# Altium PCB Lampda_PCB_V1_1.pcbdoc (part 1 of 2)
Units mm, origin at the board's own origin, x right, y up, seen from the top; angles counter-clockwise.
Board outline 71.29 x 71.78 mm, 2 copper layers (Top Layer, Bottom Layer); 128 components, 139 nets, 552 pads, 271 vias.
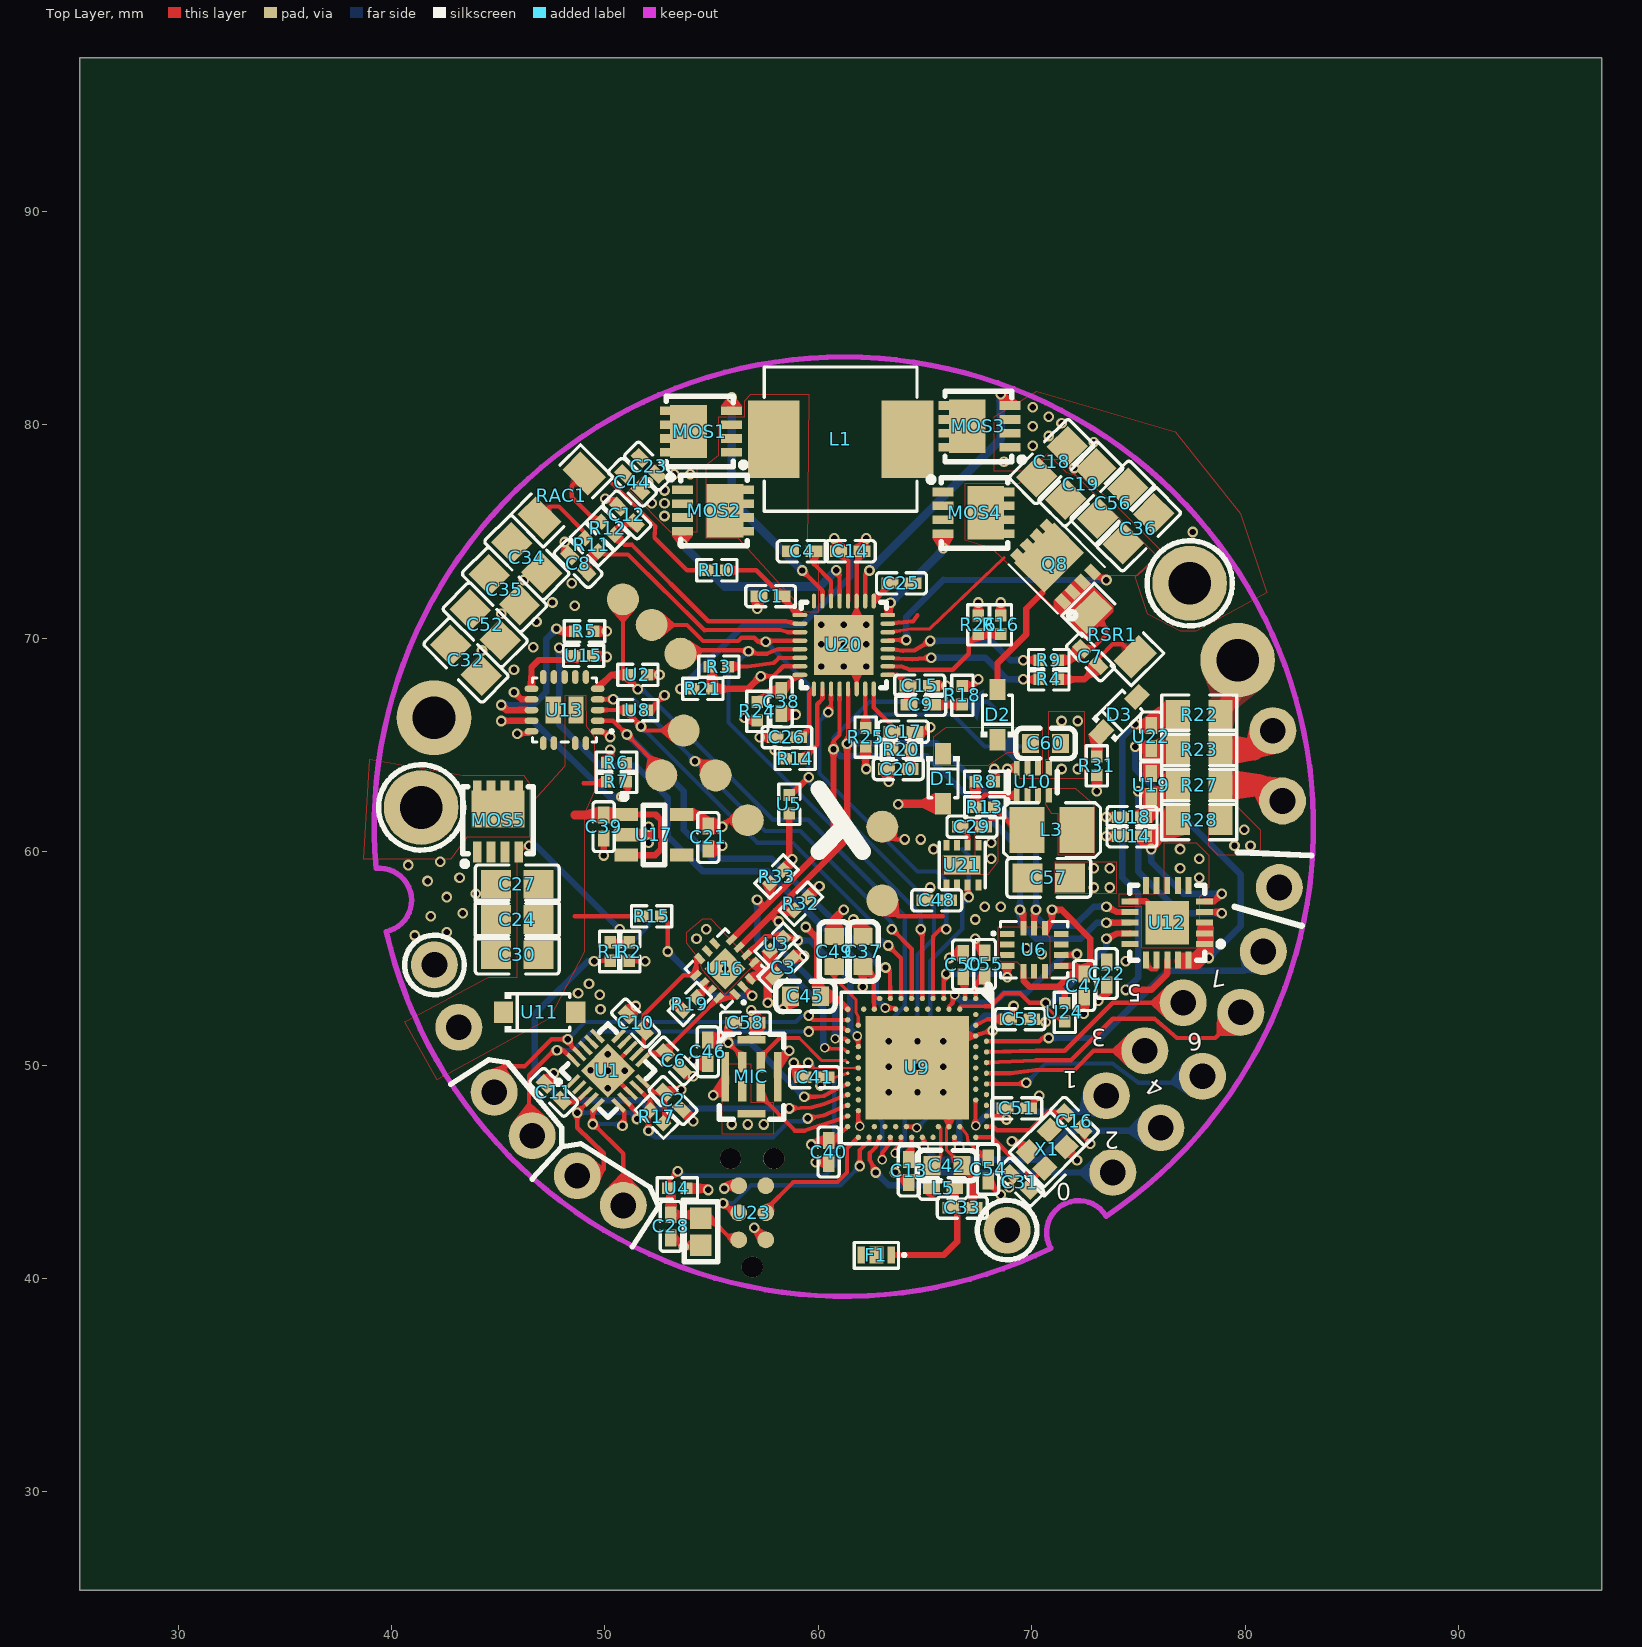
[diagram p0: Top Layer view]
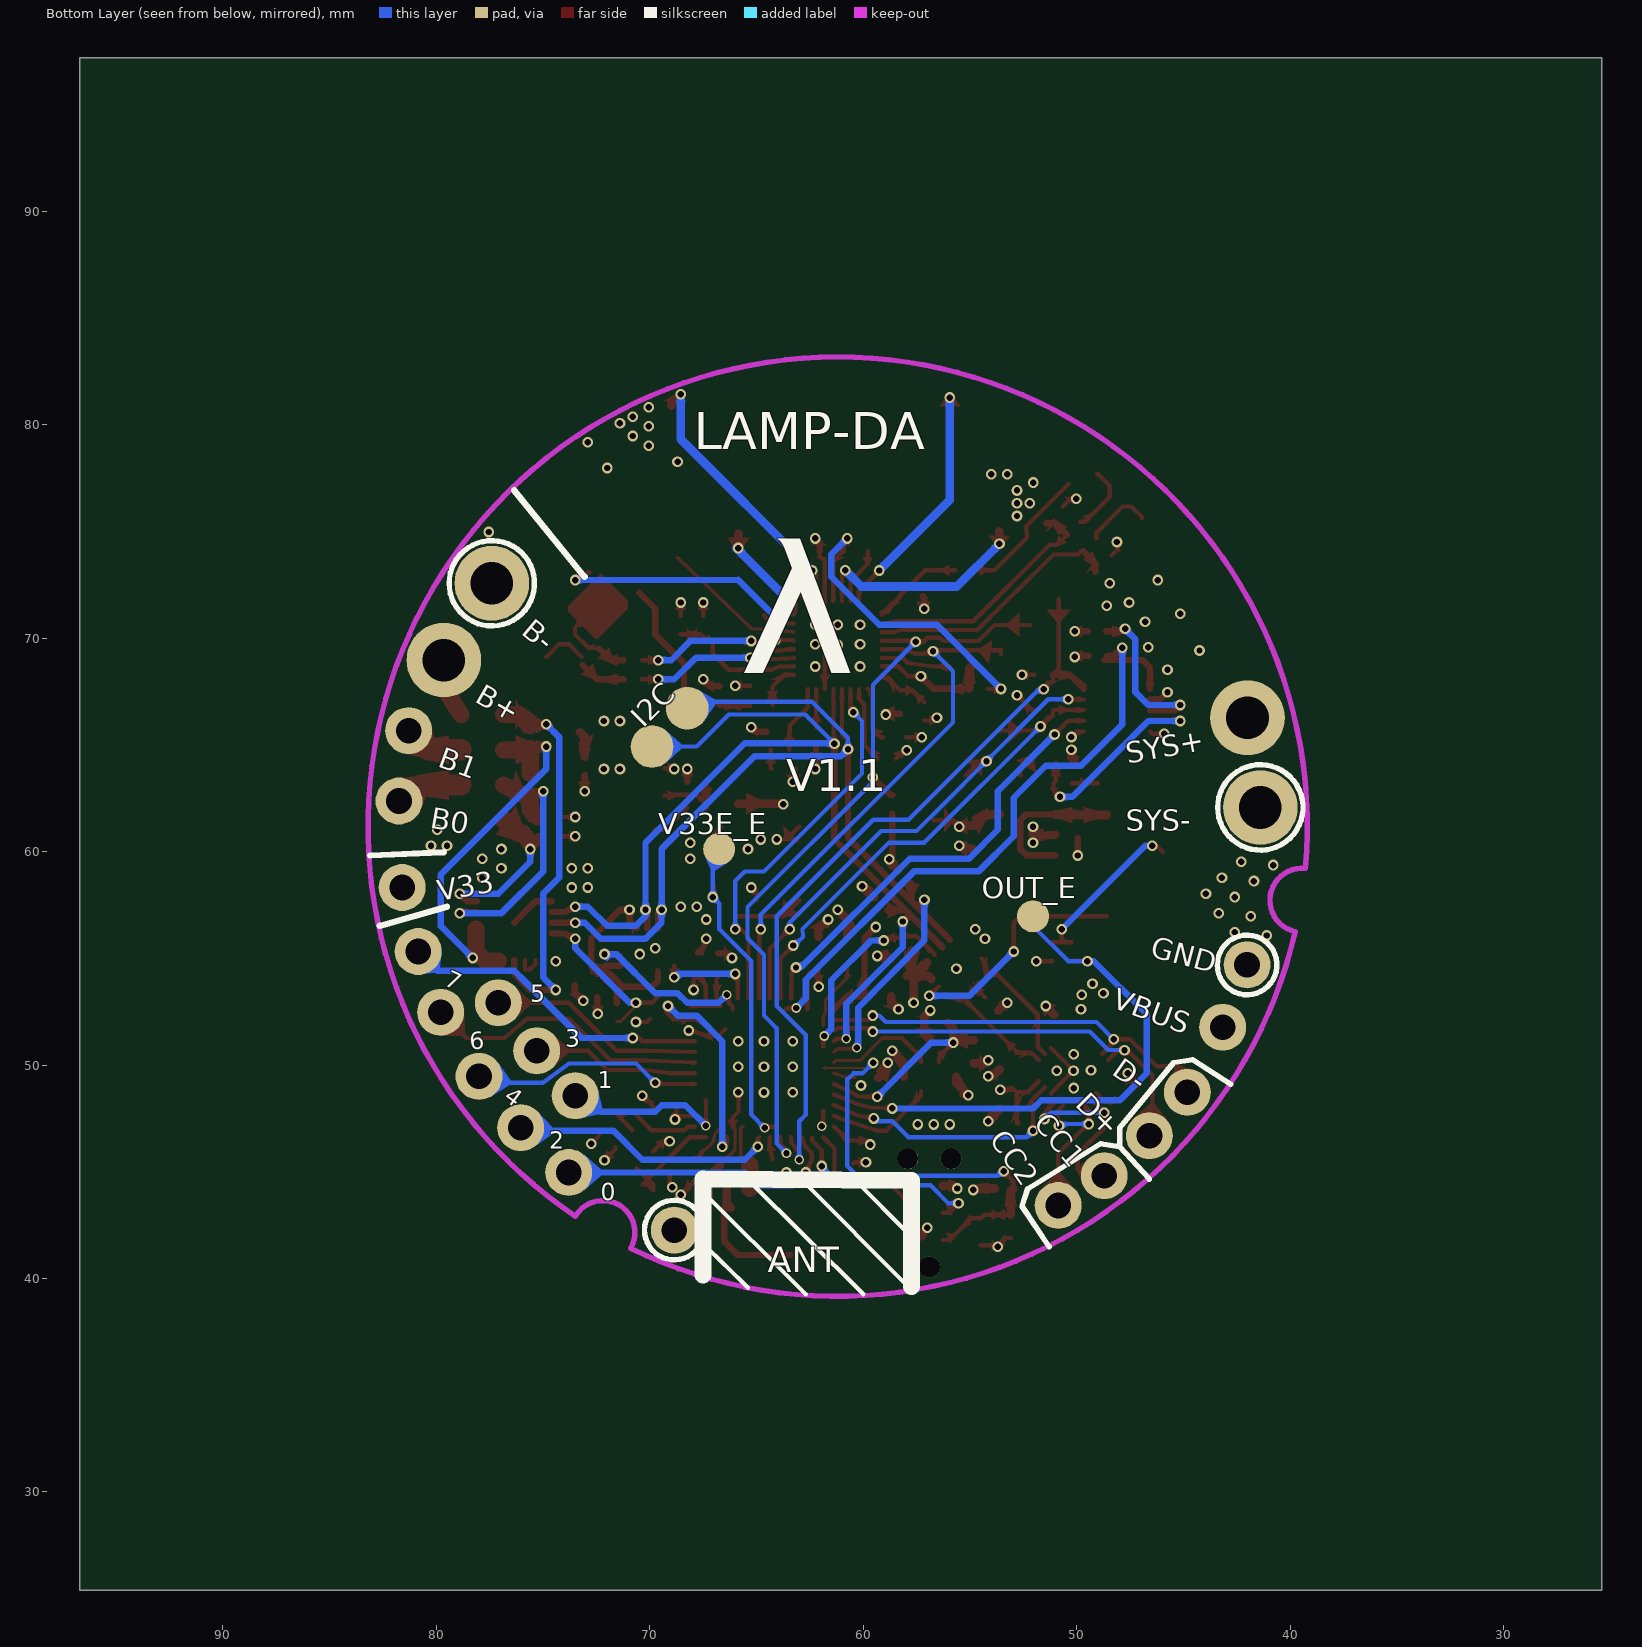
[diagram p1: Bottom Layer view, seen from below]

## Layer stack, top to bottom
Top Layer: signal copper (thickness not stored)
Dielectric: dielectric 0.32, FR-4, Dk 4.8
Bottom Layer: signal copper (thickness not stored)

## Board outline
96.689,25.4 25.4,25.4 25.4,97.18 96.689,97.18

## Components (designator, comment, footprint, x,y, rotation, side; value= is the part's Value field where it differs from the comment)
C1 "470nF" C0402 57.76,71.962 r180 top
C2 "1uF" C0402 53.188,48.34 r135 top
C3 "100nF" C0402 58.339,54.567 r225 top
C4 "47nF" C0402 59.239,74.066 r0 top
C6 "220pF" C0402 53.213,50.19 r315 top
C7 "100nF" C0402 72.739,69.116 r135 top
C8 "33nF" C0402 48.743,73.486 r315 top
C9 "680pF" C0402 64.789,66.866 r0 top
C10 "220pF" C0402 51.435,51.968 r315 top
C11 "100nF" C0402 47.6,48.721 r135 top
C12 "33nF" C0402 51.029,75.772 r135 top
C13 "820pF" C0402 64.237,45.038 r90 top
C14 "2.2uF" C0402 61.489,74.066 r180 top
C15 "15pF" C0402 64.745,67.771 r0 top
C16 "10pF" C0402 71.989,47.367 r135 top
C17 "33pF" C0402 63.983,65.612 r0 top
C18 "22uF" C0805 70.939,78.266 r225 top
C19 "22uF" C0805 72.289,77.216 r225 top
C20 "1.8nF" C0402 63.739,63.866 r180 top
C21 "2.2uF" C0402 54.839,60.659 r90 top
C22 "1uF" C0402 73.501,54.285 r90 top
C23 "10nF" C0402 52.045,78.058 r315 top
C24 "22uF" C0805 45.889,56.816 r0 top
C25 "47nF" C0402 63.889,72.566 r180 top
C26 "100pF" C0402 58.522,65.358 r180 top
C27 "22uF" C0805 45.889,58.467 r0 top
C28 "100nF" C0402 53.086,42.443 r90 top
C29 "680pF" C0402 67.189,61.167 r0 top
C30 "22uF" C0805 45.889,55.167 r0 top
C31 "10pF" C0402 69.439,44.517 r315 top
C32 "22uF" C0805 43.489,68.966 r315 top
C33 "0.5pF" C0402 66.739,43.317 r0 top
C34 "22uF" C0805 46.339,73.766 r315 top
C35 "22uF" C0805 45.289,72.266 r315 top
C36 "22uF" C0805 74.989,75.116 r225 top
C37 "4.7uF" C0603 62.089,55.317 r90 top
C38 "100pF" C0402 58.268,67.009 r270 top
C39 "1uF" C0402 49.939,61.167 r90 top
C40 "100nF" C0402 60.476,45.924 r270 top
C41 "100nF" C0402 59.817,49.428 r180 top
C42 "0.8pF" C0603 66.015,45.292 r180 top
C44 "1nF" C0402 51.283,77.296 r315 top
C45 "4.7uF" C0603 59.389,53.217 r180 top
C46 "100nF" C0402 54.819,50.622 r270 top
C47 "100nF" C0402 72.441,53.723 r90 top
C48 "1uF" C0402 65.539,57.717 r0 top
C49 "4.7uF" C0603 60.739,55.317 r90 top
C50 "100nF" C0402 66.777,54.69 r90 top
C51 "100nF" C0402 69.289,47.967 r0 top
C52 "22uF" C0805 44.389,70.616 r315 top
C53 "1uF" C0402 69.444,52.15 r180 top
C54 "100pF" C0402 67.945,45.11 r90 top
C55 "1uF" C0402 67.789,54.717 r90 top
C56 "22uF" C0805 73.789,76.316 r225 top
C57 "22uF" C0805 70.789,58.767 r180 top
C58 "1uF" C0402 56.578,51.985 r180 top
C60 "4.7uF" C0603 70.639,65.066 r180 top
D1 "BZT52C33S_C22375292" SOD-323_L1.9-W1.3-LS2.5-RD-1 65.839,63.417 r270 top
D2 "BZT52C33S_C22375292" SOD-323_L1.9-W1.3-LS2.5-RD-1 68.389,66.416 r90 top
D3 "BZT52C33S" SOD-323_L1.9-W1.3-LS2.5-RD-1 74.09,66.417 r45 top
F1 "ANT1608LL14R2400A" ANT-SMD_3P-L1.6-W0.8_ANT1608LL14R2400A 62.713,41.101 r180 top
L1 "2.2uH" IND-SMD_L7.0-W6.6_FXL0630 61.039,79.316 r180 top
L3 "DFE252012PD 2.2uH" L1008 70.939,61.017 r180 top
L5 "4.7nH" L0402 65.839,44.217 r0 top
MIC "MP34DT05TR-A" MIC-SMD_5P-L3.0-W4.0-P0.85-BL 56.863,49.45 r270 top
MOS1 "SIS412DN-T1-GE3" POWERPAK-1212-8_L3.0-W3.0-P0.65-LS3.3-BL 54.437,79.675 r90 top
MOS2 "SIS412DN-T1-GE3" POWERPAK-1212-8_L3.0-W3.0-P0.65-LS3.3-BL 55.109,75.971 r270 top
MOS3 "SIS412DN-T1-GE3" POWERPAK-1212-8_L3.0-W3.0-P0.65-LS3.3-BL 67.489,79.916 r90 top
MOS4 "SIS412DN-T1-GE3" POWERPAK-1212-8_L3.0-W3.0-P0.65-LS3.3-BL 67.316,75.866 r270 top
MOS5 "SIS412DN-T1-GE3" POWERPAK-1212-8_L3.0-W3.0-P0.65-LS3.3-BL 44.989,61.467 r0 top
Q8 "CSD25402Q3A" VSONP-8_L3.1-W3.1-P0.65-LS3.5-BL 71.089,73.466 r45 top
R1 "10Ω" R0402 50.239,55.317 r90 top
R2 "100kΩ" R0402 51.139,55.317 r270 top
R3 "10kΩ" R0402 55.339,68.666 r180 top
R4 "10Ω" R0402 70.789,68.066 r0 top
R5 "470Ω" R0402 49.039,70.316 r180 top
R6 "40.2kΩ" R0402 50.539,64.166 r180 top
R7 "619kΩ" R0402 50.539,63.266 r180 top
R8 "137kΩ" R0402 67.789,63.266 r0 top
R9 "10Ω" R0402 70.789,68.966 r0 top
R10 "1Ω" R0402 55.245,73.177 r0 top
R11 "4.99Ω" R0402 49.378,74.375 r135 top
R12 "4.99Ω" R0402 50.14,75.137 r315 top
R13 "619kΩ" R0402 67.789,62.067 r180 top
R14 "30kΩ" R0402 58.903,64.342 r180 top
R15 "4.7kΩ" R0402 52.189,56.967 r0 top
R16 "30kΩ" R0402 68.539,70.616 r270 top
R17 "100kΩ" R0402 52.426,47.578 r315 top
R18 "10kΩ" R0402 66.739,67.317 r90 top
R19 "1kΩ" R0402 53.975,52.857 r225 top
R20 "40.2kΩ" R0402 63.889,64.766 r0 top
R21 "10Ω" R0402 54.589,67.616 r0 top
R22 "10Ω" R0805 77.839,66.416 r180 top
R23 "10Ω" R0805 77.839,64.766 r180 top
R24 "137kΩ" R0402 57.139,66.566 r270 top
R25 "10kΩ" R0402 62.205,65.358 r270 top
R26 "40.2kΩ" R0402 67.489,70.616 r90 top
R27 "10Ω" R0805 77.839,63.116 r180 top
R28 "10Ω" R0805 77.839,61.467 r180 top
R31 "100Ω" R0402 73.039,64.016 r90 top
R32 "4.7kΩ" R0402 59.182,57.556 r45 top
R33 "4.7kΩ" R0402 58.039,58.826 r45 top
RAC1 "10mΩ" R1206 47.981,76.661 r45 top
RSR1 "10mΩ" R1206 73.789,70.166 r315 top
U1 "TPD8S300" WQFN-20_L3.0-W3.0-P0.40-TL-EP 50.14,49.737 r45 top
U2 "10kΩ" R0402 51.537,68.279 r180 top
U3 "10kΩ" R0402 58.039,55.651 r45 top
U4 "10kΩ" R0402 53.389,44.217 r0 top
U5 "10kΩ" R0402 58.639,62.217 r270 top
U6 "LSM6DS3TR" LGA-14_L3.0-W2.5-P0.50-TL 70.104,55.397 r0 top
U8 "10kΩ" R0402 51.537,66.628 r180 top
U9 "NRF52840-QIAA-R" AQFN-73_L7.0-W7.0-P0.50-BL-EP4.8 64.618,49.863 r180 top
U10 "TPS629206QDRLRQ1" SOT-583-8_L2.1-W1.6-P0.50-LS1.6-BL 70.039,63.266 r0 top
U11 "PTVS24VS1UR" SOD-123_L2.6-W1.7-LS3.5-RD 46.939,52.467 r0 top
U12 "BQ76905RGRR" VQFN-20_L3.5-W3.5-P0.50-TL-EP2.1 76.339,56.667 r180 top
U13 "UCS3205T-E/Q8A" VQFN-19_L3.0-W3.0-P0.50-TL-EP 48.108,66.628 r180 top
U14 "220nF" C0402 74.689,60.716 r0 top
U15 "10kΩ" R0402 48.997,69.168 r0 top
U16 "FUSB302MPX" MLP-14_L2.5-W2.5-P0.50-BL-EP 55.626,54.508 r45 top
U17 "AP2205-50W5-7" SOT-25-5_L2.9-W1.6-P0.95-LS2.8-BL 52.299,60.786 r270 top
U18 "220nF" C0402 74.689,61.617 r0 top
U19 "220nF" C0402 75.589,63.116 r90 top
U20 "BQ25713RSNR" QFN-32_L4.0-W4.0-P0.40-TL-EP2.8 61.189,69.676 r0 top
U21 "TPS22965DSGR" UDFN-8_L2.0-W2.0-P0.50-TL-EP 66.739,59.367 r90 top
U22 "220nF" C0402 75.589,65.366 r90 top
U23 "TC2030-IDC-NL" TC2030-IDC-NL 56.896,43.078 r90 top
U24 "10kΩ" R0402 71.539,52.467 r90 top
X1 "32MHz" CRYSTAL-SMD_4P-L2.0-W1.6-BL 70.714,46.054 r45 top

## Footprints (in the part's own frame and the unit in brackets; to place one, negate y for a bottom-side part, rotate by r counter-clockwise, add the part's x,y. Pads: shape width x height; smd on the part's side, far side on the other; paste and mask are expansions set on the pad)
ANT-SMD_3P-L1.6-W0.8_ANT1608LL14R2400A [mm]
  rect 0.35x0.8 smd paste+0 mask+0.05: 1(-0.7,0) 2(0.7,0)
  rect 0.66x0.8 smd paste+0 mask+0.05: 2(0,0)
  silkscreen extent -1.37,-0.58 1.04,0.62
AQFN-73_L7.0-W7.0-P0.50-BL-EP4.8 [mm]
  rect 4.85x4.85 smd paste-100 mask+0.051: 0(0,0)
  round 0.25 smd paste-100 mask+0.051: A8(-3.25,-1.25) A10(-3.25,-0.75) A12(-3.25,-0.25) A14(-3.25,0.25) A16(-3.25,0.75) A18(-3.25,1.25) A20(-3.25,1.75) A22(-3.25,2.25) A23(-3.25,2.75) AA24(2.25,3.25) AB2(2.5,-2.75) AC5(2.75,-2) AC9(2.75,-1) AC11(2.75,-0.5) AC13(2.75,0) AC15(2.75,0.5) AC17(2.75,1) AC19(2.75,1.5) AC21(2.75,2) AC24(2.75,3.25) AD2(3.25,-2.75) AD4(3.25,-2.25) AD6(3.25,-1.75) AD8(3.25,-1.25) AD16(3.25,0.75) AD18(3.25,1.25) AD20(3.25,1.75) AD22(3.25,2.25) AD23(3.25,2.75) B1(-2.75,-3.25) B3(-2.75,-2.5) B5(-2.75,-2) B7(-2.75,-1.5) B9(-2.75,-1) B11(-2.75,-0.5) B13(-2.75,0) B15(-2.75,0.5) B17(-2.75,1) B19(-2.75,1.5) B24(-2.75,3.25) C1(-2.25,-3.25) D2(-2,-2.75) D23(-2,2.75) E24(-1.75,3.25) F2(-1.5,-2.75) F23(-1.5,2.75) G1(-1.25,-3.25) H2(-1,-2.75) H23(-1,2.75) J1(-0.75,-3.25) J24(-0.75,3.25) K2(-0.5,-2.75) L1(-0.25,-3.25) L24(-0.25,3.25) M2(0,-2.75) N1(0.25,-3.25) N24(0.25,3.25) P2(0.5,-2.75) P23(0.5,2.75) R1(0.75,-3.25) R24(0.75,3.25) T2(1,-2.75) T23(1,2.75) U1(1.25,-3.25) U24(1.25,3.25) V23(1.5,2.75) W1(1.75,-3.25) W24(1.75,3.25) Y2(2,-2.75) Y23(2,2.75)
  round 0.2 smd paste-100 mask+0.051: AD10(3.25,-0.75)
  round 0.152 smd paste-100 mask+0.051: AD12(3.25,-0.25) AD14(3.25,0.25)
  silkscreen extent -3.55,-3.95 3.55,3.55
C0402 [mm]
  rect 0.79x0.54 smd paste-100 mask+0.051: 1(-0.545,0) 2(0.545,0)
  silkscreen extent -1.17,-0.5 1.17,0.5
C0603 [mm]
  rect 0.8x0.9 smd paste+0 mask+0.051: 1(-0.7,0) 2(0.7,0)
  silkscreen extent -1.39,-0.71 1.39,0.71
C0805 [mm]
  rect 1.41x1.35 smd paste-100 mask+0.051: 1(-1,0) 2(1,0)
  silkscreen extent -1.96,-0.9 1.96,0.9
CRYSTAL-SMD_4P-L2.0-W1.6-BL [mm]
  rect 0.9x0.8 smd paste+0 mask+0.051: 1(-0.7,-0.55) 2(0.7,-0.55) 3(0.7,0.55) 4(-0.7,0.55)
  silkscreen extent -1.65,-1.45 1.35,1.15
IND-SMD_L7.0-W6.6_FXL0630 [mm]
  rect 2.424x3.62 smd paste+0 mask+0.051: 1(3.128,0) 2(-3.128,0)
  silkscreen extent -3.58,-3.38 3.58,3.38
L0402 [mm]
  rect 0.79x0.54 smd paste-100 mask+0.051: 1(-0.545,0) 2(0.545,0)
  silkscreen extent -1.17,-0.5 1.17,0.5
L1008 [mm]
  rect 1.635x2.16 smd paste-100 mask+0.051: 1(-1.168,0) 2(1.167,0)
  silkscreen extent -2.27,-1.27 2.27,1.3
LGA-14_L3.0-W2.5-P0.50-TL [mm]
  rect 0.675x0.28 smd paste+0 mask+0.051: 1(-1.262,0.75) 2(-1.262,0.25) 3(-1.262,-0.25) 4(-1.262,-0.75) 8(1.262,-0.75) 9(1.262,-0.25) 10(1.262,0.25) 11(1.262,0.75)
  rect 0.28x0.675 smd paste+0 mask+0.051: 5(-0.5,-1.012) 6(0,-1.012) 7(0.5,-1.012) 12(0.5,1.012) 13(0,1.012) 14(-0.5,1.012)
  silkscreen extent -1.98,-1.33 1.58,1.33
MIC-SMD_5P-L3.0-W4.0-P0.85-BL [mm]
  rect 0.95x0.4 smd paste+0 mask+0.051: 1(-0.675,-0.425) 2(0.675,-0.425) 3(0.675,0.425) 4(-0.675,0.425)
  rect 0.35x1.3 smd paste+0 mask+0.051: 5(-1.725,0) 5(1.725,0)
  rect 2.3x0.35 smd paste+0 mask+0.051: 5(0,1.225) 5(0,-1.225)
  silkscreen extent -2,-1.5 2,1.52
MLP-14_L2.5-W2.5-P0.50-BL-EP [mm]
  rect 0.28x0.505 smd paste-100 mask+0.051: 1(-0.5,-1.177) 2(0,-1.177) 3(0.5,-1.177) 8(0.5,1.178) 9(0,1.178) 10(-0.5,1.178)
  rect 0.505x0.28 smd paste-100 mask+0.051: 4(1.178,-0.75) 5(1.178,-0.25) 6(1.178,0.25) 7(1.178,0.75) 11(-1.177,0.75) 12(-1.177,0.25) 13(-1.177,-0.25) 14(-1.177,-0.75)
  rect 1.375x1.375 smd paste-100 mask+0.051: 15(0,0)
  silkscreen extent -1.33,-1.8 1.33,1.33
POWERPAK-1212-8_L3.0-W3.0-P0.65-LS3.3-BL [mil]
  rect 15.98x39.02 smd paste-3937.01 mask+1.97: 1(-38.38,-58.5) 2(-12.79,-58.5) 3(12.8,-58.5) 4(38.39,-58.5)
  rect 15.98x30 smd paste-3937.01 mask+1.97: 5(38.39,58.5) 6(12.8,58.5) 7(-12.79,58.5) 8(-38.38,58.5)
  rect 98.42x67.99 smd paste-3937.01 mask+1.97: 8(0,20.5)
  silkscreen extent -66,-85 65,61
QFN-32_L4.0-W4.0-P0.40-TL-EP2.8 [mm]
  oval 0.7x0.2 smd paste-100 mask+0.051: 1(-2.057,1.4) 2(-2.057,1) 3(-2.057,0.6) 4(-2.057,0.2) 5(-2.057,-0.2) 6(-2.057,-0.6) 7(-2.057,-1) 8(-2.057,-1.4) 17(2.057,-1.4) 18(2.057,-1) 19(2.057,-0.6) 20(2.057,-0.2) 21(2.057,0.2) 22(2.057,0.6) 23(2.057,1) 24(2.057,1.4)
  oval 0.2x0.7 smd paste-100 mask+0.051: 9(-1.4,-2.057) 10(-1,-2.057) 11(-0.6,-2.057) 12(-0.2,-2.057) 13(0.2,-2.057) 14(0.6,-2.057) 15(1,-2.057) 16(1.4,-2.057) 25(1.4,2.057) 26(1,2.057) 27(0.6,2.057) 28(0.2,2.057) 29(-0.2,2.057) 30(-0.6,2.057) 31(-1,2.057) 32(-1.4,2.057)
  rect 2.8x2.8 smd paste-100 mask+0.051: 33(0,0)
  silkscreen extent -2.31,-2 2,2
R0402 [mm]
  rect 0.566x0.54 smd paste-100 mask+0.051: 1(-0.433,0) 2(0.433,0)
  silkscreen extent -0.94,-0.5 0.94,0.5
R0805 [mm]
  rect 1.133x1.377 smd paste-100 mask+0.051: 1(-1,0) 2(1,0)
  silkscreen extent -1.76,-0.92 1.76,0.92
R1206 [mm]
  rect 1.208x1.701 smd paste-100 mask+0.051: 1(-1.479,0) 2(1.479,0)
  silkscreen extent -2.31,-1.08 2.31,1.08
SOD-123_L2.6-W1.7-LS3.5-RD [mm]
  rect 0.9x1 smd paste+0 mask+0.051: 1(-1.693,0) 2(1.693,0)
  silkscreen extent -1.63,-0.94 1.41,0.94
SOD-323_L1.9-W1.3-LS2.5-RD-1 [mm]
  rect 1x0.75 smd paste+0 mask+0.051: 1(-1.173,0) 2(1.173,0)
  silkscreen extent -1.05,-0.78 0.9,0.78
SOT-25-5_L2.9-W1.6-P0.95-LS2.8-BL [mil]
  rect 24.5x43.5 smd paste+0 mask+2: 1(-37.39,-51.18) 2(-0.03,-51.18) 3(37.39,-51.18) 4(37.39,51.18) 5(-37.39,51.18)
  silkscreen extent -75,-60 56,20
SOT-583-8_L2.1-W1.6-P0.50-LS1.6-BL [mm]
  rect 0.28x0.68 smd paste+0 mask+0.051: 1(-0.75,-0.64) 2(-0.25,-0.64) 3(0.25,-0.64) 4(0.75,-0.64) 5(0.75,0.64) 6(0.25,0.64) 7(-0.25,0.64) 8(-0.75,0.64)
  silkscreen extent -1.27,-0.92 1.14,0.51
TC2030-IDC-NL [mil]
  round 31 smd paste+0: 1(-50,-25) 2(-50,25) 3(0,-25) 4(0,25) 5(50,-25) 6(50,25)
  round 39 hole 39 unplated paste+0: ""(-100,0) ""(100,-40) ""(100,40)
UDFN-8_L2.0-W2.0-P0.50-TL-EP [mm]
  rect 0.505x0.28 smd paste+0 mask+0.051: 1(-0.928,0.75) 2(-0.928,0.25) 3(-0.928,-0.25) 4(-0.928,-0.75) 5(0.928,-0.75) 6(0.928,-0.25) 7(0.928,0.25) 8(0.928,0.75)
  rect 0.9x1.7 smd paste+0 mask+0.051: 9(0,0)
  silkscreen extent -1.56,-1.08 1.08,1.08
VQFN-19_L3.0-W3.0-P0.50-TL-EP [mm]
  oval 0.65x0.3 smd paste+0 mask+0.05: 1(-1.55,1) 2(-1.55,0.5) 3(-1.55,0) 4(-1.55,-0.5) 5(-1.55,-1) 11(1.55,-1) 12(1.55,-0.5) 13(1.55,0) 14(1.55,0.5) 15(1.55,1)
  oval 0.3x0.65 smd paste+0 mask+0.05: 6(-1,-1.55) 7(-0.5,-1.55) 8(0,-1.55) 9(0.5,-1.55) 10(1,-1.55) 16(1,1.55) 17(0.5,1.55) 19(-0.5,1.55) 20(-1,1.55)
  rect 0.715x1.26 smd paste+0 mask+0.05: 21(-0.535,0) 22(0.535,0)
  silkscreen extent -2.27,-1.5 1.5,1.5
VQFN-20_L3.5-W3.5-P0.50-TL-EP2.1 [mm]
  rect 0.8x0.28 smd paste-100 mask+0.05: 1(-1.751,1.001) 2(-1.751,0.501) 3(-1.751,0.001) 4(-1.751,-0.499) 5(-1.749,-1) 11(1.749,-0.999) 12(1.751,-0.501) 13(1.749,0.001) 14(1.749,0.501) 15(1.749,1.001)
  rect 0.28x0.8 smd paste-100 mask+0.05: 6(-0.999,-1.751) 7(-0.499,-1.751) 8(0.001,-1.751) 9(0.501,-1.751) 10(1.001,-1.751) 16(0.999,1.751) 17(0.499,1.751) 18(-0.001,1.751) 19(-0.501,1.751) 20(-1.001,1.751)
  rect 2.05x2.05 smd paste-100 mask+0.05: 21(-0.001,0.001)
  silkscreen extent -2.62,-1.75 1.75,1.75
VSONP-8_L3.1-W3.1-P0.65-LS3.5-BL [mm]
  rect 0.45x0.68 smd paste-100 mask+0.05: 1(-0.988,-1.498) 2(-0.337,-1.498) 3(0.313,-1.498) 4(0.963,-1.498)
  rect 0.5x0.6 smd paste-100 mask+0.05: 5(0.988,1.499) 6(0.338,1.499) 7(-0.312,1.499) 8(-0.962,1.499)
  rect 2.65x2 smd paste-100 mask+0.05: 9(0.013,0.407)
  silkscreen extent -1.55,-2.42 1.55,1.52
WQFN-20_L3.0-W3.0-P0.40-TL-EP [mm]
  rect 0.8x0.2 smd paste+0 mask+0.051: 1(-1.5,0.8) 2(-1.5,0.4) 3(-1.5,0) 4(-1.5,-0.4) 5(-1.5,-0.8) 11(1.5,-0.8) 12(1.5,-0.4) 13(1.5,0) 14(1.5,0.4) 15(1.5,0.8)
  rect 0.2x0.8 smd paste+0 mask+0.051: 6(-0.8,-1.5) 7(-0.4,-1.5) 8(0,-1.5) 9(0.4,-1.5) 10(0.8,-1.5) 16(0.8,1.5) 17(0.4,1.5) 18(0,1.5) 19(-0.4,1.5) 20(-0.8,1.5)
  rect 1.8x1.8 smd paste+0 mask+0.051: 21(0,0)
  silkscreen extent -2.13,-1.55 1.55,1.55

## Free pads (board coordinates)
  rect 1x1 smd paste-100 mask+0.051: 1(54.483,41.554) 1(54.483,42.824)
  round 1.5 smd paste+0 mask+0.051: 2(52.639,63.567) 3(53.689,65.667) 4(56.689,61.467) 9(62.989,61.167) 9(62.989,57.717) 11(55.189,63.567) ""(50.839,71.817) ""(52.189,70.617) ""(53.539,69.267)
  round 1.5 smd far side paste+0 mask+0.051: 10(66.739,60.117) 12(52.039,56.967)
  round 2 smd far side paste+0 mask+0.051: 10(68.237,66.718) 10(69.886,64.918)
  round 3.5 hole 2 paste+0 mask+0.051: ""(41.389,62.067) ""(41.989,66.267) ""(77.389,72.566) ""(79.639,68.967)
  round 2.2 hole 1.2 paste+0 mask+0.051: ""(42.012,54.69) ""(43.155,51.769) ""(44.806,48.721) ""(46.584,46.689) ""(48.701,44.816) ""(50.861,43.422) ""(68.837,42.267) ""(73.487,48.568) ""(73.788,44.967) ""(75.287,50.668) ""(76.038,47.067) ""(77.087,52.918) ""(77.989,49.467) ""(79.789,52.467) ""(80.838,55.318) ""(81.288,65.667) ""(81.589,58.317) ""(81.739,62.367)

## Via types
v1: diameter 0.5, hole 0.3, Top Layer to Bottom Layer, tented both sides, 261 vias
v2: diameter 0.45, hole 0.3, Top Layer to Bottom Layer, tented both sides, 10 vias

## Nets (pads, with @x,y where several pads share a name; then routed paths per layer and width w, separated by ;. In a path a pad name is that pad's centre, name@x,y a point inside that pad or via, vN(x,y) a via of type N, cw(c..) or ccw(c..) an arc to the next point about the centre after c; other vN are vias at no path point)
AIN0: pad.@79.789,52.467 U9.A12 | length 13.6
  Top Layer w0.2: U9.A12@67.868,50.113 70.189,50.217 ; 70.181,50.223 71.832,50.223 73.788,52.166 75.739,52.166 76.789,51.267 78.589,51.267 pad.@79.789,52.467
AIN1: U9.B13
AIN3: U9.K2
AIN4: U9.B11
AIN5: pad.@77.087,52.918 U9.A10 | length 10.2
  Top Layer w0.2: U9.A10@67.868,50.613 70.189,50.667 71.539,50.666 73.789,52.917 pad.@77.089,52.917
AIN6: U9.B9
AIN7: pad.@80.838,55.318 U9.A8 | length 14.7
  Top Layer w0.2: U9.A8@67.868,51.113 70.339,51.117 70.489,51.267 v1(70.789,51.267)
  Bottom Layer w0.3: v1(70.789,51.267) 73.188,51.267 75.833,53.911 76.338,54.417 79.94,54.417 pad.@80.839,55.316
ANT: C42.2 L5.1 U9.H23 | length 3.2
  Top Layer w0.152: C42.2@65.315,45.291 65.734,45.71 65.734,47.037 U9.H23@65.617,47.114
  Top Layer w0.8: L5.1@65.294,44.217 65.294,45.321 C42.2@65.319,45.347
BAT0: pad.@81.739,62.367 R27.1 | length 3.1
  Top Layer w1: R27.1@78.843,63.127 80.689,63.116 pad.@81.739,62.367
BAT1: pad.@81.288,65.667 R23.1 | length 2.8
  Top Layer w1: R23.1@78.839,64.766 80.389,64.766 pad.@81.289,65.666
BAT+: C7.1 D3.2 pad.@79.639,68.967 R4.2 R22.1 RSR1.2 | length 5.6
  Top Layer w0.2: 73.189,69.116 73.788,69.715 74.24,69.715 RSR1.2@74.835,69.121
  Top Layer w0.3: R4.2@71.222,68.067 72.46,68.066 C7.1@73.124,68.731
  Top Layer w0.8: R22.1@78.839,66.416 pad.@79.489,67.466
C9_2: C9.2 R18.1 | length 1.4
  Top Layer w0.3: C9.2@65.334,66.867 65.351,66.884 R18.1@66.739,66.884
C13_2: C13.2 U9.N24 | length 1
  Top Layer w0.2: C13.2@64.237,45.583 64.368,46.196 U9.N24@64.368,46.613
C33_1: C33.1 F1.1 L5.2 | length 5.9
  Top Layer w0.3: F1.1@63.412,41.1 65.873,41.1 66.493,41.722 C33.1@66.493,43.317
  Top Layer w0.4: C33.1@66.194,43.317 66.384,43.506 L5.2@66.384,44.217
C50_1: C50.1 U9.C1 | length 1.1
  Top Layer w0.2: C50.1@66.777,54.144 66.868,54.054 U9.C1@66.868,53.113
C54_2: C54.2 U9.D23 | length 2.1
  Top Layer w0.152: U9.D23@66.618,47.114 66.648,47.142 66.954,46.743 66.999,46.436 67.781,45.657 C54.2@67.945,45.655
CC1: pad.@48.701,44.816 U1.4 U1.7 | length 9.4
  Top Layer w0.2: pad.@48.7,44.816 49.939,45.117 49.94,45.867 48.7,47.059 48.7,47.765 v1(48.706,47.77) 49.328,48.392 U1.4@49.361,48.392 ; U1.7@50.928,48.392 51.476,47.726 v1(51.5,47.469)
  Bottom Layer w0.2: v1(48.706,47.77) 51.199,47.77 v1(51.5,47.469)
CC2: pad.@50.861,43.422 U1.5 U1.6 | length 7.9
  Top Layer w0.2: U1.5@49.645,48.115 49.422,47.894 49.422,47.285 50.862,45.844 pad.@50.861,43.422 ; U1.6@50.635,48.11 50.903,47.831 50.903,47.231 v1(50.821,47.149)
  Bottom Layer w0.2: v1(49.422,47.233) 50.737,47.233 v1(50.821,47.149)
CELL0: R27.2 U12.4 U18.2 U19.1 | length 12.5
  Top Layer w0.3: v1@74.987,62.817 75.344,62.817 U19.1@75.589,62.571 ; U12.4@78.09,57.166 78.889,57.166 v1(78.889,57.116)
  Top Layer w0.8: U18.2@75.234,61.617 75.589,61.972 U19.1@75.589,62.571 ; U19.1@75.589,62.571 76.069,62.709 R27.2@76.839,63.116
  Bottom Layer w0.3: v1@74.987,62.817 74.987,59.068 76.94,57.117 v1@78.888,57.117
  other v1: 74.987,62.817
CELL1: R23.2 U12.1 U12.2 U12.3 U12.19 U12.20 U19.2 U22.1 | length 19.3
  Top Layer w0.3: v1(74.839,64.917) 75.494,64.916 U22.1@75.589,64.821 ; U12.2@78.09,56.166 78.09,55.216 v1(78.289,55.016)
  Top Layer w0.8: U19.2@75.589,63.662 U22.1@75.589,64.821 75.644,64.766 R23.2@76.839,64.766 ; 77.089,54.867 77.689,54.867 78.139,55.317 78.139,56.367
  Bottom Layer w0.3: v1(74.839,64.917) 74.84,63.866 79.79,58.915 79.79,56.518 v1@78.289,55.016
CELL2: R22.2 U12.18 U22.2 | length 18.4
  Top Layer w0.3: v1(74.389,53.517) 75.589,53.518 76.341,54.267 U12.18@76.34,54.916 ; v1(74.839,65.967) 74.894,65.912 U22.2@75.589,65.912
  Top Layer w0.8: U22.2@75.589,65.912 76.094,66.416 R22.2@76.839,66.416
  Bottom Layer w0.3: v1(74.389,53.517) 74.989,54.117 74.989,58.016 74.24,58.765 74.24,65.367 v1(74.839,65.967)
CELL-: R28.2 U12.5 U14.2 | length 7.9
  Top Layer w0.3: U14.2@75.234,60.716 75.234,60.47 v1(75.587,60.117) ; U12.5@78.088,57.667 78.54,57.667 v1(78.889,58.016)
  Top Layer w0.8: 75.589,60.416 75.94,60.856 76.178,60.856 76.788,61.465 R28.2@76.839,61.465
  Bottom Layer w0.3: v1@75.586,60.117 75.586,59.52 77.09,58.016 v1@78.888,58.016
CH_ACN: C12.1 R12.2 U20.2 | length 11.3
  Top Layer w0.2: R12.2@50.448,74.828 50.91,74.366 51.263,74.366 54.84,70.79 58.497,70.79 U20.2@58.886,70.67
  Top Layer w0.3: R12.2@50.446,74.83 51.002,75.386 C12.1@51.415,75.386
CH_ACP: C8.2 R11.1 U20.3 | length 12.2
  Top Layer w0.2: R11.1@49.683,74.069 49.783,74.069 49.935,73.917 51.073,73.917 54.662,70.366 58.215,70.378 58.561,70.277 U20.3@59.132,70.277
  Top Layer w0.3: C8.2@49.129,73.1 49.128,73.513 R11.1@49.684,74.068
CH_BATDRV: Q8.4 U20.21 | length 12.8
  Top Layer w0.2: U20.21@63.246,69.875 63.28,69.909 v1(64.12,69.909) ; Q8.4@72.829,73.088 v1@73.488,72.715
  Bottom Layer w0.3: v1(64.12,69.909) 64.121,70.998 65.845,72.723 v1@73.488,72.715
  other v1: 73.489,72.716
CH_BATPREZ: R16.2 R26.1 U20.18 | length 6.3
  Top Layer w0.2: U20.18@63.246,68.675 63.89,68.666 64.263,68.516 65.839,68.516 ; 65.84,68.516 66.29,68.516 67.039,69.266 67.039,69.761 67.636,70.183 R16.2@68.539,70.184
CH_BTST1: C4.2 U20.30 | length 2.7
  Top Layer w0.2: C4.2@59.784,74.067 59.784,73.464 60.589,72.659 U20.30@60.589,71.732
CH_BTST2: C25.2 U20.25 | length 1.1
  Top Layer w0.2: U20.25@62.589,71.732 63.344,72.487 C25.2@63.344,72.567
CH_CHARGE_OK: pad.@52.189,70.617 U5.1 U9.R24 U20.4 | length 37.5
  Top Layer w0.2: pad.@52.189,70.617 53.839,70.617 54.588,69.865 56.239,69.865 56.389,70.018 56.988,70.018 57.182,69.825 v1(57.531,69.824) ; v1(57.531,69.824) 57.583,69.875 U20.4@59.132,69.875 ; v2@63.587,45.867 63.587,46.015 63.869,46.297 U9.R24@63.868,46.613
  Top Layer w0.3: U5.1@58.639,62.649 58.71,62.649 v1(59.538,63.478)
  Bottom Layer w0.2: v1(57.531,69.824) 59.539,67.815 v1(59.538,63.478) 59.539,63.266 65.409,57.396 65.409,55.936 64.639,55.166 64.639,52.316 64.04,51.717 64.04,46.319 v2@63.587,45.867
  other v2: 63.588,45.868
CH_CMPOUT: R25.1 U20.15 | length 1.8
  Top Layer w0.2: U20.15@62.188,67.617 R25.1@62.205,65.79
CH_COMP1: C17.1 R20.1 U20.16 | length 3.2
  Top Layer w0.2: U20.16@62.589,67.618 62.589,66.751 63.438,65.903 63.438,65.611 63.456,65.592 R20.1@63.456,64.767
CH_COMP2: C9.1 C15.1 U20.17 | length 2.1
  Top Layer w0.2: U20.17@63.246,68.275 63.695,68.275 C15.1@64.2,67.771 64.244,67.727 C9.1@64.244,66.867
CH_EN_OTG: pad.@53.539,69.267 U9.L1 U20.5 | length 26.3
  Top Layer w0.2: pad.@53.539,69.267 53.539,69.426 56.691,69.426 v1@56.724,69.375 ; v1@56.724,69.383 57.139,69.266 57.588,69.266 58.119,69.477 U20.5@59.132,69.475 ; v1@64.789,56.368 64.868,56.368 U9.L1@64.868,53.114
  Bottom Layer w0.2: v1@56.724,69.383 55.79,68.448 55.79,66.05 64.789,57.051 v1@64.789,56.368
  other v1: 64.789,56.366 56.725,69.382
CH_HIDRV1: MOS1.4 U20.31 | length 11.9
  Top Layer w0.2: v1(59.239,73.166) 60.189,72.217 U20.31@60.189,71.732
  Top Layer w0.4: MOS1.4@55.923,80.65 55.923,81.251 v1(55.939,81.267)
  Bottom Layer w0.4: v1(55.939,81.267) 55.939,76.466 v1(59.239,73.166)
CH_HIDRV2: MOS4.4 U20.24 | length 4.9
  Top Layer w0.4: 63.289,71.216 63.246,71.526 v1(63.373,71.653) ; MOS4.4@65.83,74.891 65.84,74.881 v1(65.839,74.217)
  Bottom Layer w0.4: v1(63.373,71.653) 65.937,74.216 v1(65.839,74.217)
CH_IADPT: C38.1 R24.1 U20.8 | length 2.5
  Top Layer w0.2: R24.1@57.139,66.999 57.693,67.554 C38.1@58.268,67.554 ; C38.1@58.268,67.554 58.99,68.275 U20.8@59.132,68.275
CH_IBAT: C26.1 U20.9 | length 2.6
  Top Layer w0.2: C26.1@59.067,65.358 59.161,65.358 59.563,65.76 59.563,67.392 U20.9@59.789,67.618
CH_ILIMHIZ: R3.1 U20.6 | length 3.3
  Top Layer w0.2: R3.1@55.939,68.666 56.689,68.666 57.903,68.829 58.144,69.073 U20.6@59.132,69.07
CH_INT_N: U3.2 U9.AC9 U16.5 | length 9.3
  Top Layer w0.2: U16.5@56.635,55.164 57.504,56.032 58.039,56.032 U3.2@58.345,55.957 58.905,55.957 v1(59.03,55.833) ; v2(61.815,51.36) 61.868,51.307 U9.AC9@61.868,50.863
  Bottom Layer w0.3: v1(59.03,55.833) 59.622,55.832 61.489,53.965 61.489,51.686 v2@61.814,51.361
CH_LODRV1: MOS2.4 U20.29 | length 10.5
  Top Layer w0.2: v1(60.833,73.177) 60.989,73.021 U20.29@60.989,71.732
  Top Layer w0.4: v1(53.612,74.411) 53.612,74.985 MOS2.4@53.624,74.996
  Bottom Layer w0.4: v1(53.612,74.411) 55.607,72.415 60.072,72.415 v1(60.833,73.177)
CH_LODRV2: MOS3.4 U20.26 | length 13
  Top Layer w0.2: U20.26@62.189,71.732 62.189,72.967 v1(62.389,73.166)
  Top Layer w0.4: v1(68.539,81.416) 68.975,80.981 MOS3.4@68.975,80.891
  Bottom Layer w0.4: v1(62.389,73.166) 68.539,79.317 v1(68.539,81.416)
CH_PROC_HOT: U9.J1 U20.11 | length 18.1
  Top Layer w0.2: v1(60.452,66.522) 60.589,66.659 U20.11@60.589,67.618 ; U9.J1@65.368,53.113 65.368,56.02 65.715,56.366 v1(65.989,56.366)
  Bottom Layer w0.2: v1(60.452,66.522) 60.047,66.116 60.047,63.66 64.639,59.068 65.538,59.068 65.99,58.616 v1(65.989,56.366)
CH_PSYS: R14.1 U20.10 | length 3.6
  Top Layer w0.2: R14.1@59.336,64.342 59.336,64.39 59.944,64.998 59.944,66.903 60.189,67.148 U20.10@60.189,67.618
CH_REGN: C14.2 R21.1 U20.28 | length 16.1
  Top Layer w0.2: v1(53.539,67.617) R21.1@54.156,67.617 ; C14.2@60.943,74.066 61.39,73.617 U20.28@61.389,71.732
  Top Layer w0.3: v1(60.739,74.666) 60.944,74.462 C14.2@60.944,74.066
  Bottom Layer w0.3: v1(53.539,67.617) 56.539,70.617 59.239,70.617 61.489,72.868 61.489,73.917 v1(60.739,74.666)
CH_SRN: R4.1 U20.19 | length 7.5
  Top Layer w0.2: U20.19@63.246,69.07 64.387,69.007 v1(65.28,69.083) ; v1(69.589,68.066) R4.1@70.356,68.067
  Bottom Layer w0.3: v1@65.279,69.083 67.822,69.083 68.838,68.067 v1(69.589,68.066)
CH_SRP: R9.1 U20.20 | length 7.6
  Top Layer w0.2: U20.20@63.246,69.475 63.529,69.474 63.958,69.4 64.489,69.416 v1@65.238,69.865 ; v1(69.589,68.967) R9.1@70.356,68.967
  Bottom Layer w0.3: v1(65.239,69.867) 68.089,69.867 68.989,68.967 v1(69.589,68.967)
CH_SW1: C4.1 L1.1 MOS1.1 MOS1.2 MOS1.3 MOS2.5 MOS2.6 MOS2.7 MOS2.8 U20.32
CH_SW2: C25.1 L1.2 MOS3.5 MOS3.6 MOS3.7 MOS3.8 MOS4.1 MOS4.2 MOS4.3 U20.23 | length 1.5
  Top Layer w0.2: U20.23@63.246,70.675 64.443,70.792 64.639,71.066
CH_VBUS: C1.1 R10.2 U20.1 | length 4.4
  Top Layer w0.2: R10.2@55.678,73.177 57.089,73.177 C1.1@58.305,71.962 58.305,71.902 U20.1@59.132,71.075
CH_VDDA: R3.2 R16.1 R21.2 U20.7 | length 20.7
  Top Layer w0.2: v1@57.288,68.217 57.888,68.217 58.352,68.679 U20.7@59.132,68.679 ; R16.1@68.539,71.049 v1(68.539,71.666)
  Top Layer w0.3: R21.2@55.022,67.617 56.689,67.616 ; 56.689,67.617 v1@57.288,68.217
  Top Layer w0.4: R3.2@54.906,68.666 55.022,68.551 R21.2@55.022,67.617
  Mid-Layer 2 w0.3: v1@57.288,68.217 58.789,69.718 58.789,71.516 59.838,72.565 67.639,72.565 v1@68.538,71.666
  other v1: 57.289,68.217
D3_1: D3.1 R31.2 | length 1.2
  Top Layer w0.4: R31.2@73.039,64.449 73.039,65.367 D3.1@73.261,65.588
D+: pad.@46.584,46.689 U1.20 U9.AD6 | length 19.8
  Top Layer w0.2: pad.@46.584,46.689 46.445,46.688 46.445,49.517 47.626,50.698 v1(47.752,50.698) ; v1(47.752,50.698) 48.047,50.698 U1.20@48.514,50.232 ; v1(59.539,51.567) 59.689,51.717 61.189,51.717 U9.AD6@61.367,51.613
  Bottom Layer w0.2: v1(47.752,50.698) 48.514,50.698 49.382,51.567 v1(59.539,51.567)
D-: pad.@44.806,48.721 U1.19 U9.AD4 | length 19.5
  Top Layer w0.2: pad.@44.806,48.721 44.806,49.531 45.212,49.936 46.228,49.936 47.498,51.206 v1(48.26,51.206) 48.26,51.051 U1.19@48.797,50.514 ; v1(59.539,52.316) 59.742,52.113 U9.AD4@61.368,52.113
  Bottom Layer w0.2: v1(48.26,51.206) 49.071,52.017 58.937,52.017 59.241,52.319 v1@59.539,52.316
DEC6: C53.2 U9.B5 U9.E24 | length 11
  Top Layer w0.2: U9.E24@66.368,46.613 66.368,46.388 v1(66.589,46.167) ; U9.B5@67.367,51.864 67.919,52.145 68.899,52.149 69.14,52.39 v1(69.139,52.766)
  Bottom Layer w0.3: v1(66.589,46.167) 66.59,51.117 67.789,52.316 68.688,52.316 v1(69.139,52.766)
DECUSB: C49.1 U9.AC5 | length 3.2
  Top Layer w0.152: C49.1@60.739,54.616 60.739,54.095 61.444,53.391 61.754,53.068 61.761,52.479 61.868,52.233 U9.AC5@61.868,51.864
FAULT: R17.1 U1.9 U9.AD20 | length 12.2
  Top Layer w0.2: U1.9@51.483,48.958 52.12,48.322 R17.1@52.12,47.884 52.039,47.804 v1(52.039,46.917) ; v1@59.498,47.506 60.226,47.635 U9.AD20@61.367,48.128
  Bottom Layer w0.2: v1@52.038,46.916 52.338,46.617 57.877,46.617 58.627,47.366 59.239,47.366 v1@59.493,47.498
  other v1: 59.494,47.499
GND: C1.2 C2.1 C3.1 C6.2 C8.1 C10.1 C11.2 C12.2 C13.1 C14.1 C15.2 C16.1 C17.2 C18.1 C19.1 C20.2 C21.1 C22.1 C23.2 C24.1 C26.2 C27.1 C28.1 C29.2 C30.1 C31.1 C32.2 C33.2 C34.2 C35.2 C36.1 C37.2 C38.2 C39.1 C40.2 C41.2 C42.1 C44.2 C45.2 C46.2 C47.1 C48.1 C49.2 C50.2 C51.2 C52.2 C53.1 C54.1 C55.2 C56.1 C57.1 C58.1 C60.1 MIC.2 MIC.5 MOS2.1 MOS2.2 MOS2.3 MOS3.1 MOS3.2 MOS3.3 MOS5.1 MOS5.2 MOS5.3 pad.1@54.483,41.554 pad.@42.012,54.69 pad.@68.837,42.267 pad.@77.389,72.566 R2.2 R5.1 R6.2 R8.2 R14.2 R18.2 R19.2 R24.2 R25.2 R26.2 R28.1 U1.8 U1.13 U1.16 U1.17 U1.18 U1.21 U2.1 U6.1 U6.2 U6.3 U6.6 U6.7 U8.1 U9.0 U9.B7 U9.F23 U10.5 U10.8 U11.2 U12.6 U12.7 U12.8 U12.11 U12.21 U13.1 U13.12 U13.15 U14.1 U16.8 U16.9 U16.15 U17.2 U18.1 U20.14 U20.27 U20.33 U21.5 U21.9 U23.6 X1.2 X1.4 | length 70.9
  Top Layer w0.152: U9.F23@66.117,47.114 65.993,47.033 66.003,46.002 C42.1@66.714,45.291
  Top Layer w0.2: v1(45.889,65.517) 46.447,65.517 U13.15@46.558,65.628 ; v1(48.108,74.502) 48.108,74.12 C8.1@48.358,73.871 ; U13.1@49.658,65.628 49.978,65.628 v1(50.239,65.366) ; v1(50.013,76.534) 50.267,76.534 C12.2@50.644,76.157 ; R2.2@51.139,54.884 51.156,54.867 v1(51.889,54.867) ; U1.8@51.201,48.676 v1(50.14,49.737) U1.13@51.201,50.797 ; U8.1@51.97,66.628 52.1,66.628 v1(52.789,67.317) ; U2.1@51.97,68.279 v1(52.553,68.279) ; C28.1@53.086,41.898 53.279,41.898 v1(53.696,41.482) 53.769,41.554 pad.1@54.483,41.554 ; v1(56.539,66.267) 56.672,66.134 R24.2@57.139,66.134 ; v1(57.252,65.358) C26.2@57.977,65.358 ; v1(57.953,64.741) 58.215,64.595 R14.2@58.469,64.341 ; v1(59.866,45.445) 60.41,45.445 C40.2@60.476,45.379 ; U20.14@61.789,67.618 61.789,70.017 v1(61.189,70.617) v1(62.239,70.617) 61.789,71.067 U20.27@61.789,71.732 61.789,73.617 62.035,73.861 C14.1@62.034,74.066 ; v1(63.589,44.967) 64.063,44.492 C13.1@64.237,44.492 ; C48.1@64.994,57.717 64.995,58.072 v1(65.239,58.317) ; C15.2@65.29,67.771 65.985,67.771 v1(65.989,67.766) ; U9.0@65.838,48.717 65.838,47.818 66.117,47.539 U9.F23@66.117,47.114 ; U9.0@66.45,51.688 66.775,51.363 U9.B7@67.368,51.363 ; v1(67.339,55.917) 67.339,55.711 67.789,55.262 67.762,55.235 C55.2@67.539,55.235 ; U9.B7@67.368,51.363 67.463,51.417 68.069,51.625 v1(68.159,51.619) ; R26.2@67.489,71.049 v1(67.489,71.666) ; C54.1@67.945,44.565 67.945,44.511 v1(68.539,43.917) ; v1(68.839,63.867) 68.879,63.907 U10.8@69.289,63.907 ; v1(68.936,44.276) 69.059,44.399 C31.1@69.054,44.902 ; v1(69.063,46.435) 69.343,46.435 X1.4@69.83,45.948 ; C51.2@69.834,47.967 69.834,48.062 v1(70.339,48.567) ; C53.1@69.989,52.15 70.122,52.016 v1(70.639,52.016) ; X1.2@71.598,46.159 71.598,46.059 v1(72.111,45.546) ; C16.1@72.375,46.981 72.375,46.681 v1(72.739,46.316) ; v1(73.489,60.716) U14.1@74.144,60.716 ; v1(73.489,61.617) U18.1@74.144,61.617
  Top Layer w0.3: v1(45.739,67.466) 46.079,67.127 U13.12@46.558,67.128 ; R5.1@49.472,70.316 v1(50.089,70.316) ; v1(49.939,59.816) C39.1@49.939,60.621 ; v1(57.139,71.366) 57.139,71.886 C1.2@57.215,71.962 ; C38.2@58.268,66.463 58.892,66.463 v1(58.939,66.416) ; C14.1@62.034,74.066 62.034,74.461 v1(62.239,74.666) ; R25.2@62.205,64.925 62.205,63.901 v1(62.239,63.867) ; C20.2@63.194,63.866 63.289,63.771 v1(63.289,63.267) ; C17.2@64.528,65.612 65.034,65.612 v1(65.239,65.816) ; v1(66.139,55.016) 66.357,55.235 C50.2@66.777,55.235 ; R18.2@66.739,67.749 67.172,67.749 v1(67.489,68.066) ; R8.2@68.222,63.266 68.239,63.284 v1(68.239,63.867) ; v1(72.423,52.407) C47.1@72.441,53.178 ; v1(73.101,53.007) 73.501,53.407 C22.1@73.501,53.74 ; U12.11@74.59,57.666 75.34,57.666 U12.21@76.34,56.666
  Top Layer w0.4: C11.2@47.215,49.106 47.6,49.491 v1(47.6,49.61) ; R6.2@50.106,64.166 50.106,64.334 50.239,64.467 v1(50.239,64.766) ; U17.2@50.999,60.786 52.039,60.716 52.038,60.416 v1@52.038,61.166 ; C10.1@51.05,52.354 51.439,52.743 v1(51.439,52.766) ; v1(52.039,60.416) v1(52.039,61.167) ; v1(53.239,52.917) 53.304,52.917 R19.2@53.669,52.551 ; C2.1@53.572,47.955 54.139,47.388 v1(54.139,47.366) ; C6.2@53.598,49.805 53.937,49.466 v1(54.139,49.466) ; v1(54.139,50.217) 54.279,50.076 C46.2@54.819,50.077 ; C21.1@54.839,60.113 v1(55.489,60.267) ; v1(55.066,48.587) 55.638,49.158 MIC.5@55.638,49.45 ; v1(55.591,44.214) 55.726,44.348 U23.6@56.261,44.348 ; v1(56.858,52.557) 57.123,52.292 C58.1@57.123,51.985 57.123,51.435 MIC.5@56.863,51.175 ; MIC.5@58.088,49.45 58.088,50.116 v1@58.639,50.667 ; v1(58.339,52.617) 58.689,52.966 C45.2@58.689,53.217 ; C3.1@58.725,54.952 58.883,55.111 v1(59.338,55.111) ; v1@58.827,50.122 58.957,49.675 C41.2@59.285,49.395 ; C49.2@60.739,56.016 60.739,56.817 v1(61.189,57.267) ; v1(61.639,56.816) 62.089,56.367 C37.2@62.089,56.016 ; C42.1@66.714,45.291 67.237,44.767 67.237,43.718 C33.2@67.283,43.317
  other v1: 55.939,47.217 56.689,47.217 57.439,47.217 63.288,48.717 64.639,48.717 65.839,48.717 50.137,48.92 50.932,49.739 49.323,49.748 63.288,49.917 64.639,49.917 65.839,49.917 58.84,50.103 50.132,50.51 58.639,50.667 63.289,51.117 64.638,51.117 65.839,51.117 49.789,52.617 49.759,53.293 48.739,53.366 49.251,53.801 55.626,54.508 70.46,55.198 69.739,55.466 54.289,55.917 41.089,56.066 42.589,56.217 54.739,56.366 41.839,56.967 43.339,57.116 42.589,57.867 43.939,58.016 72.889,58.317 73.639,58.317 41.689,58.617 43.189,58.766 77.838,58.767 72.889,59.217 73.639,59.217 76.939,59.217 40.789,59.366 42.289,59.517 68.089,59.666 77.838,59.667 76.939,60.116 79.489,60.267 80.239,60.267 68.089,60.416 79.939,61.016 71.389,63.867 72.139,63.867 71.388,66.116 72.139,66.116 45.739,68.516 60.139,68.666 61.189,68.666 62.239,68.666 44.239,69.416 46.639,69.567 61.189,69.675 60.139,69.716 62.239,69.716 60.139,70.617 46.789,70.766 45.141,71.137 48.589,71.516 47.539,71.666 48.436,72.561 46.189,72.717 77.539,74.967 52.789,75.716 52.189,76.317 52.789,76.317 52.789,76.917 52.03,77.284 53.239,77.666 53.989,77.666 71.989,77.967 68.689,78.267 70.039,79.016 72.889,79.166 70.789,79.466 70.039,79.917 71.389,80.066 70.789,80.366 70.039,80.816
I2CM_CLK: pad.10@69.886,64.918 R32.1 U6.13 U9.AD8 U12.12 U16.6 U20.13 | length 52.7
  Top Layer w0.2: v2(60.783,51.233) 61.249,51.233 U9.AD8@61.368,51.113 ; v1(61.341,65.049) 61.39,65.098 U20.13@61.389,67.618
  Top Layer w0.3: U16.6@56.282,55.518 61.342,60.576 v1(61.341,65.049) ; 57.804,57.038 v1(58.141,56.722) ; 58.001,57.237 R32.1@58.876,57.25 ; U6.13@70.105,56.409 70.105,57.267 v1(70.189,57.267) ; v1@73.488,57.417 73.986,57.168 U12.12@74.588,57.167
  Bottom Layer w0.2: v1(61.341,65.049) 62.709,66.416 66.29,66.416 67.789,64.917 pad.10@69.889,64.917
  Bottom Layer w0.3: v1(58.141,56.722) 58.142,55.514 60.783,52.873 v2(60.783,51.233) ; v1(61.341,65.049) 61.359,65.066 65.389,65.066 ; 65.388,65.067 65.538,65.067 70.189,60.416 v1(70.189,57.267) 70.189,56.967 70.638,56.518 71.99,56.518 72.889,57.417 v1@73.488,57.417
  other v1: 73.489,57.416
I2CM_SDA: pad.10@68.237,66.718 R33.1 U6.14 U9.AD10 U12.13 U16.7 U20.12 | length 54.1
  Top Layer w0.152: v2@60.288,50.815 60.488,50.764 61.164,50.758 U9.AD10@61.367,50.615
  Top Layer w0.2: v1(60.707,64.796) 60.707,65.176 60.989,65.458 U20.12@60.989,67.618
  Top Layer w0.3: U16.7@55.928,55.871 60.707,60.65 v1(60.707,64.796) ; v1(57.125,57.738) 57.439,57.423 57.439,57.382 ; 57.733,57.695 R33.1@57.733,58.52 ; v1(69.439,57.267) 69.604,57.102 U6.14@69.604,56.41 ; v1@73.488,56.667 73.788,56.667 U12.13@74.59,56.666
  Bottom Layer w0.2: v1(60.707,64.796) 60.707,65.334 62.389,67.016 67.939,67.016 pad.10@68.239,66.717
  Bottom Layer w0.3: v1(57.125,57.738) 57.126,55.842 60.224,52.687 v2@60.227,50.858 ; v1(60.707,64.796) 61.035,64.468 65.089,64.468 ; 65.089,64.467 69.439,60.117 v1(69.439,57.267) ; v1(69.439,57.267) 69.44,56.667 70.189,55.916 72.289,55.916 73.039,56.665 v1@73.488,56.667
  other v1: 73.489,56.666
  other v2: 60.289,50.817
I2S_CLK: MIC.3 U9.AD22 | length 5.1
  Top Layer w0.2: MIC.3@57.288,48.775 57.288,48.567 58.898,46.924 ; 58.893,46.926 59.363,46.924 60.865,47.429 U9.AD22@61.367,47.615
I2S_DATA: MIC.4 U9.AD12 | length 5.2
  Top Layer w0.152: 59.089,51.267 60.141,50.216 61.263,50.218 U9.AD12@61.367,50.114
  Top Layer w0.2: MIC.4@57.288,50.125 57.288,50.365 58.189,51.267 59.089,51.267
IMU_INT2: U6.9 U9.F2 | length 8.4
  Top Layer w0.2: U9.F2@66.118,52.613 66.118,52.745 66.289,52.917 66.289,53.194 v2(66.381,53.286) ; U6.9@71.366,55.147 72.061,55.147 v1(72.111,55.198)
  Bottom Layer w0.3: v2(66.381,53.286) 66.752,52.916 68.238,52.916 68.69,53.365 69.737,53.365 71.571,55.197 v1(72.111,55.198)